# Altium PCB PCB2.PcbDoc
Units mm, origin at the board's own origin, x right, y up, seen from the top; angles counter-clockwise.
Board outline 44.32 x 52.83 mm, 4 copper layers (Top Layer, Int1 (GND), Int2 (PWR), Bottom Layer), stack 1.369 mm thick; 16 components, 14 nets, 84 pads, 10 vias.
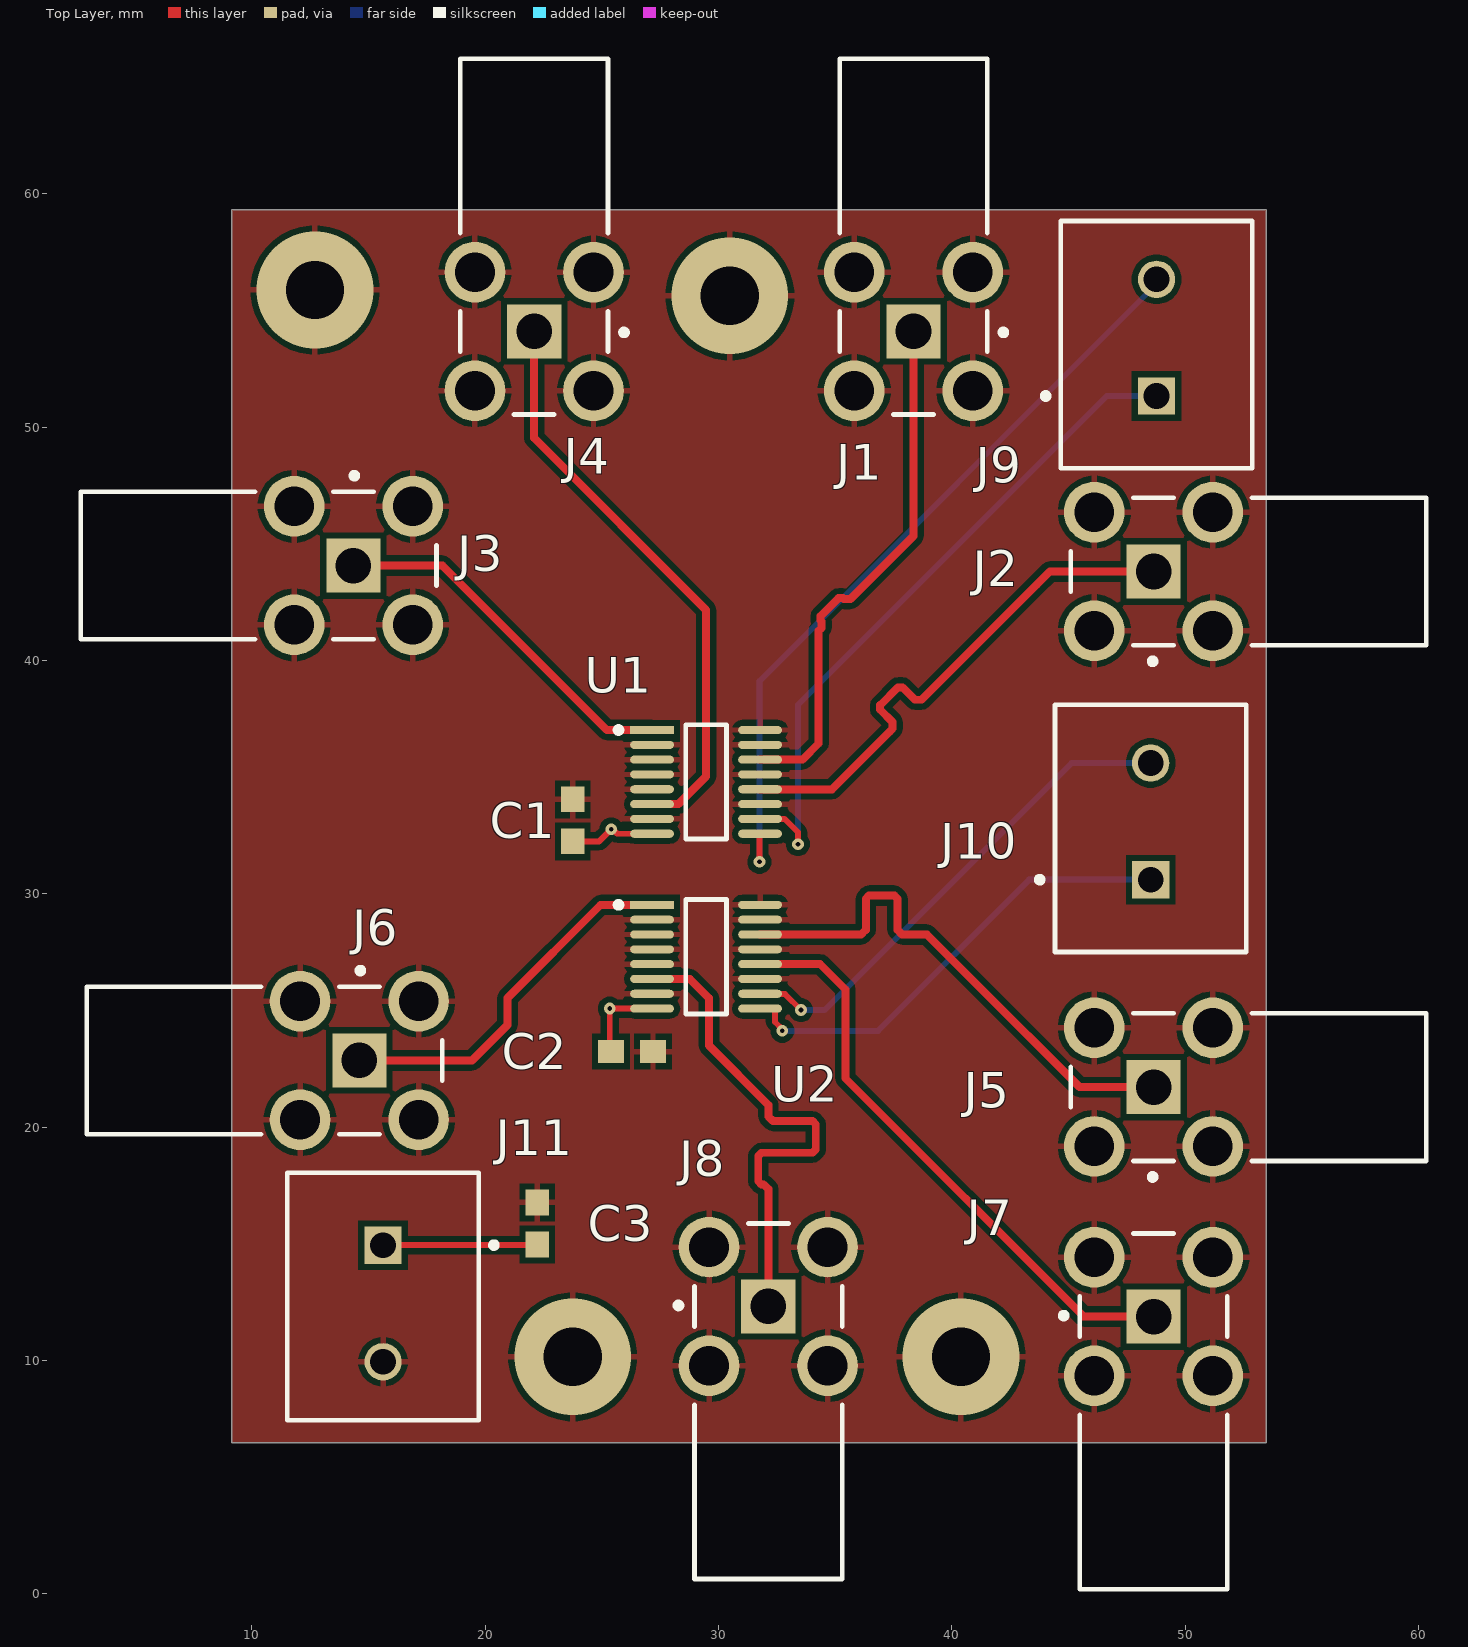
[diagram p0: Top Layer view]
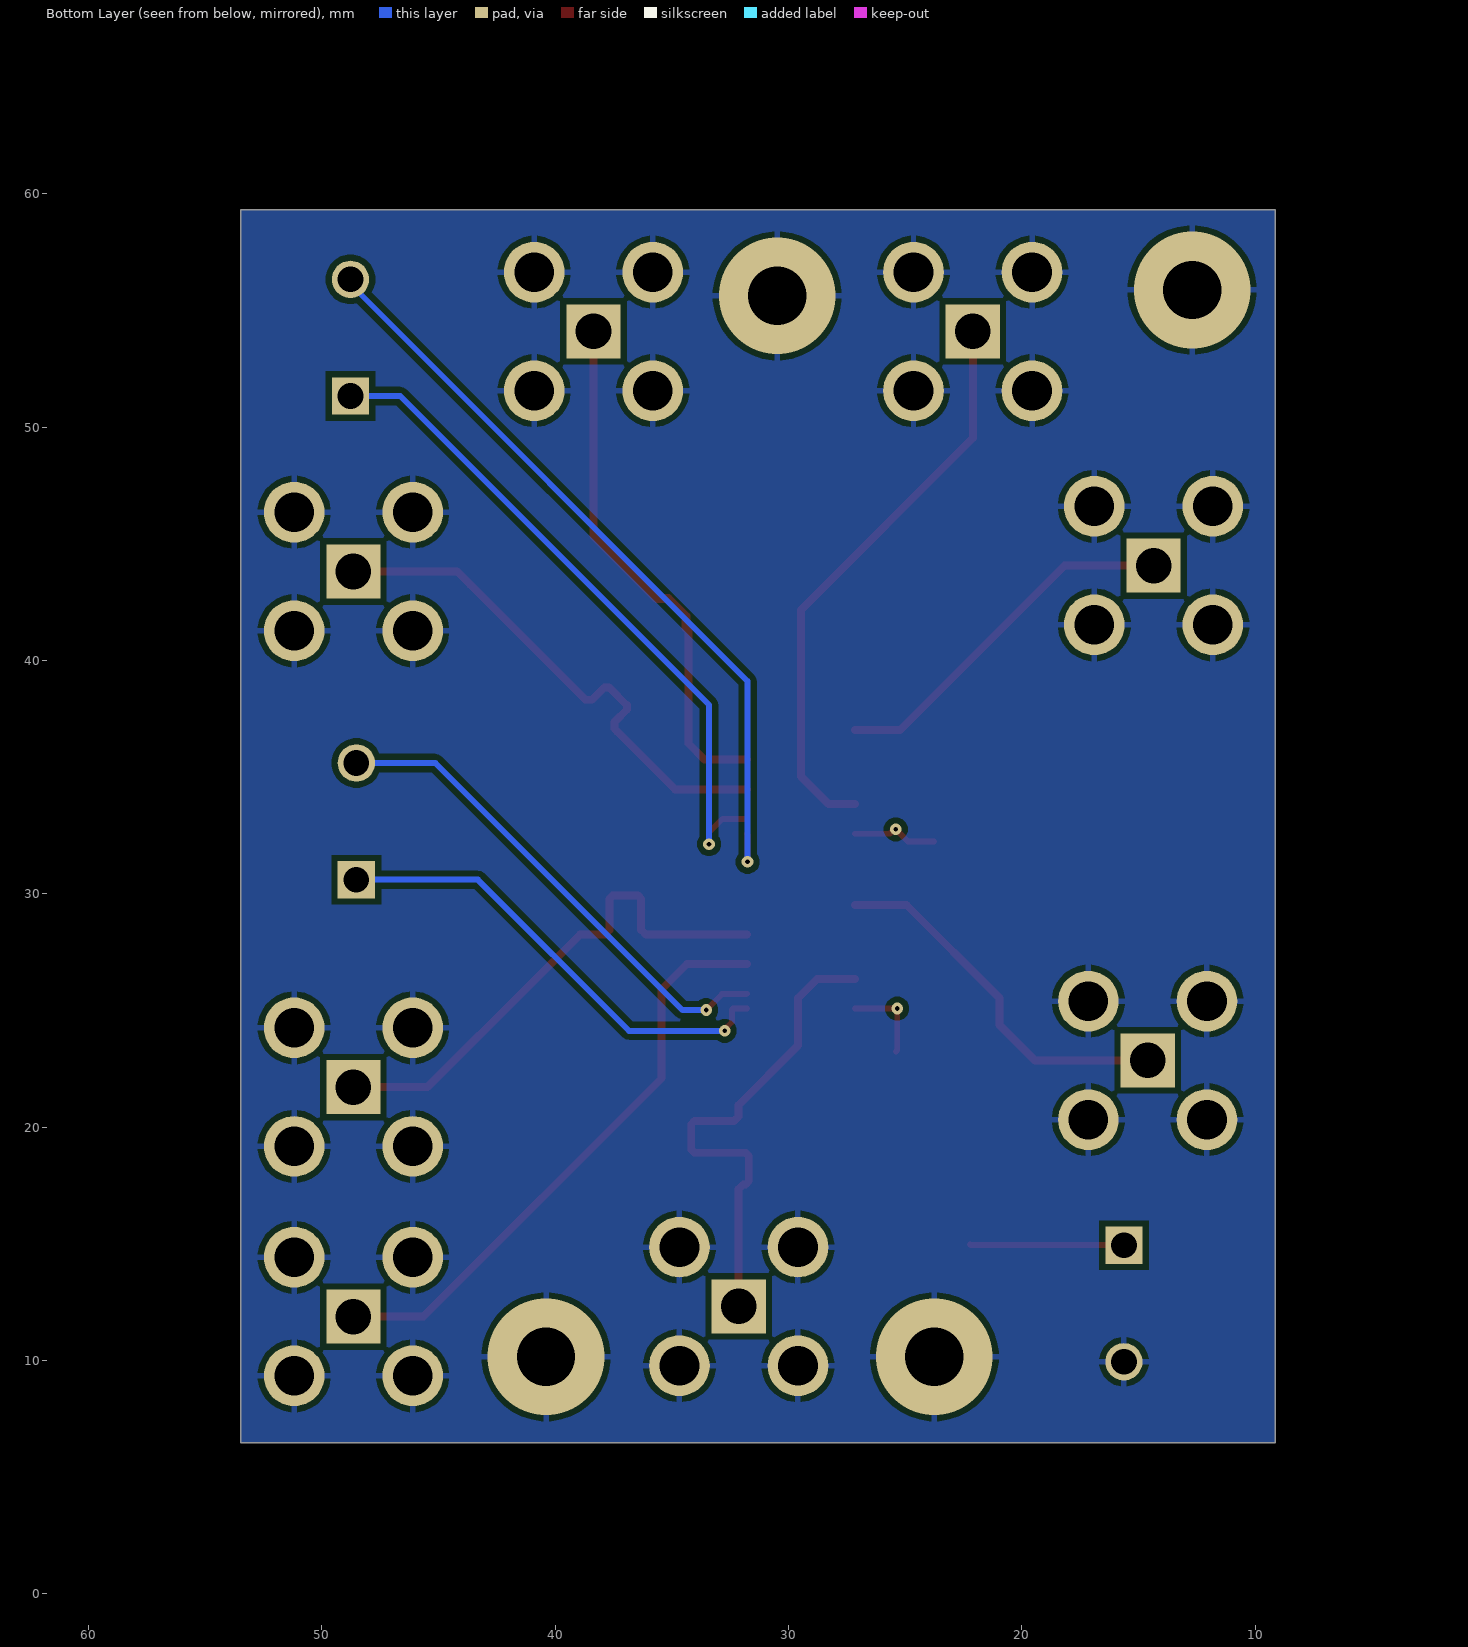
[diagram p1: Bottom Layer view, seen from below]
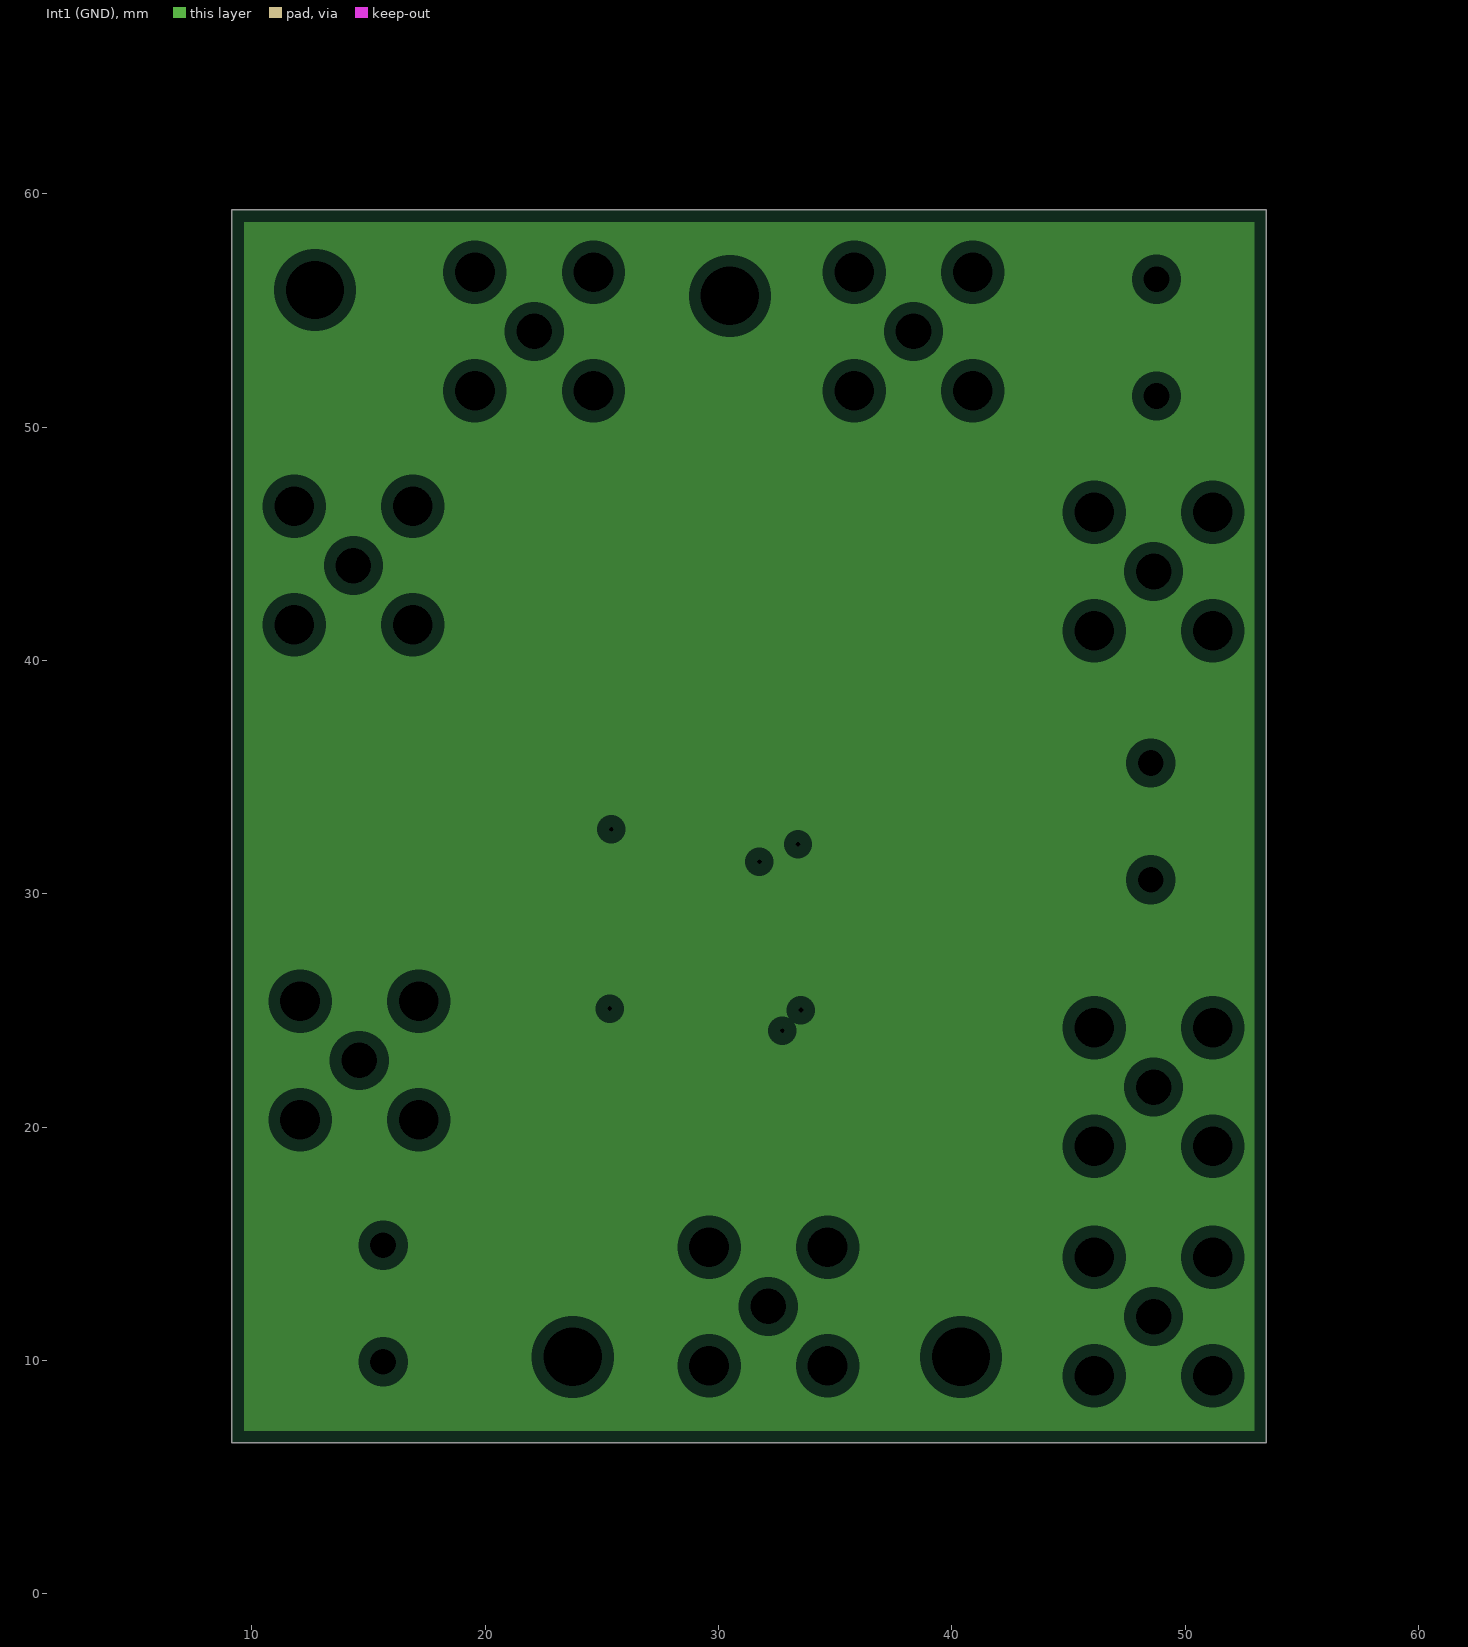
[diagram p2: Int1 (GND), clearances drawn from the general rule]
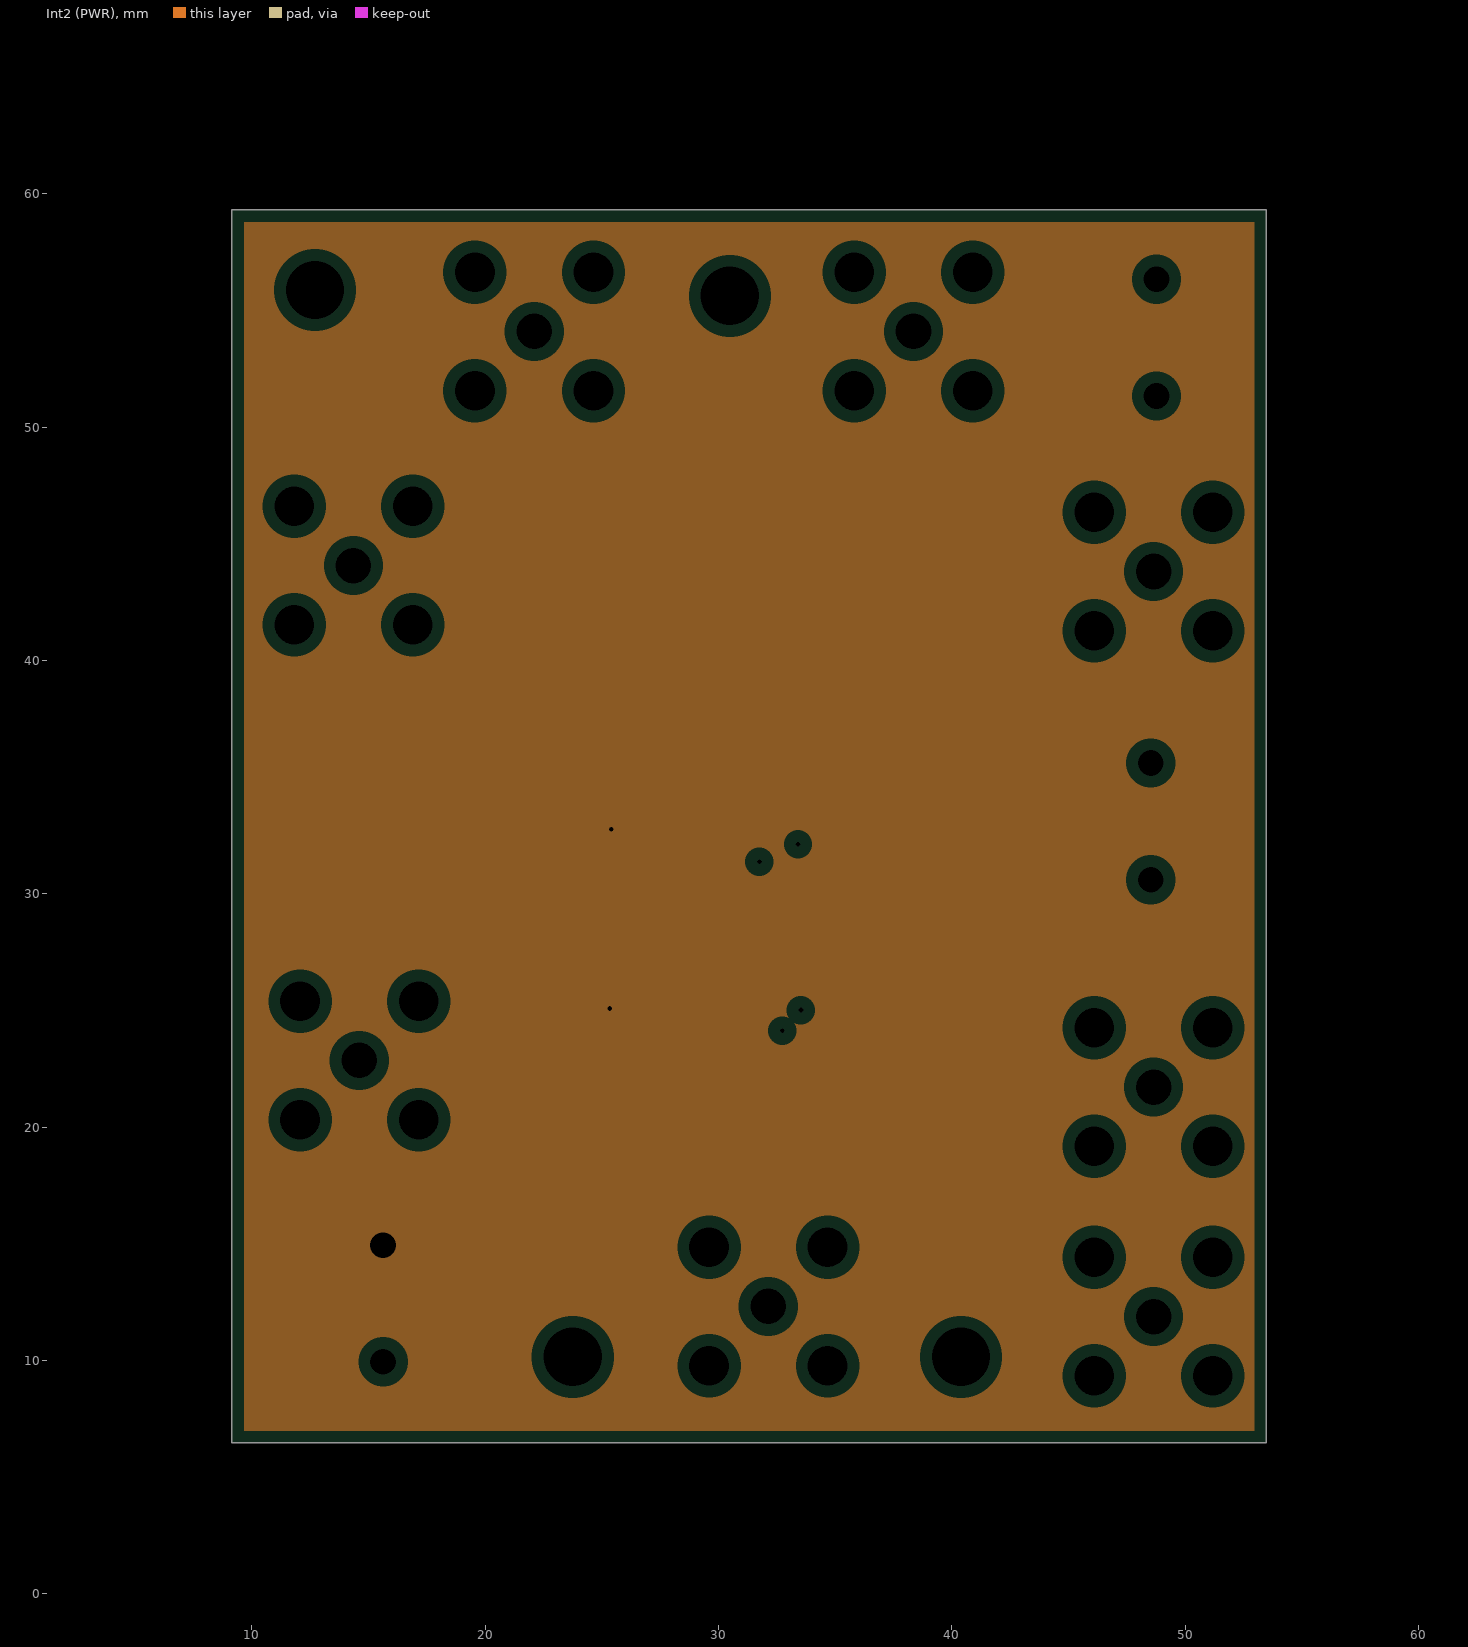
[diagram p3: Int2 (PWR), clearances drawn from the general rule]
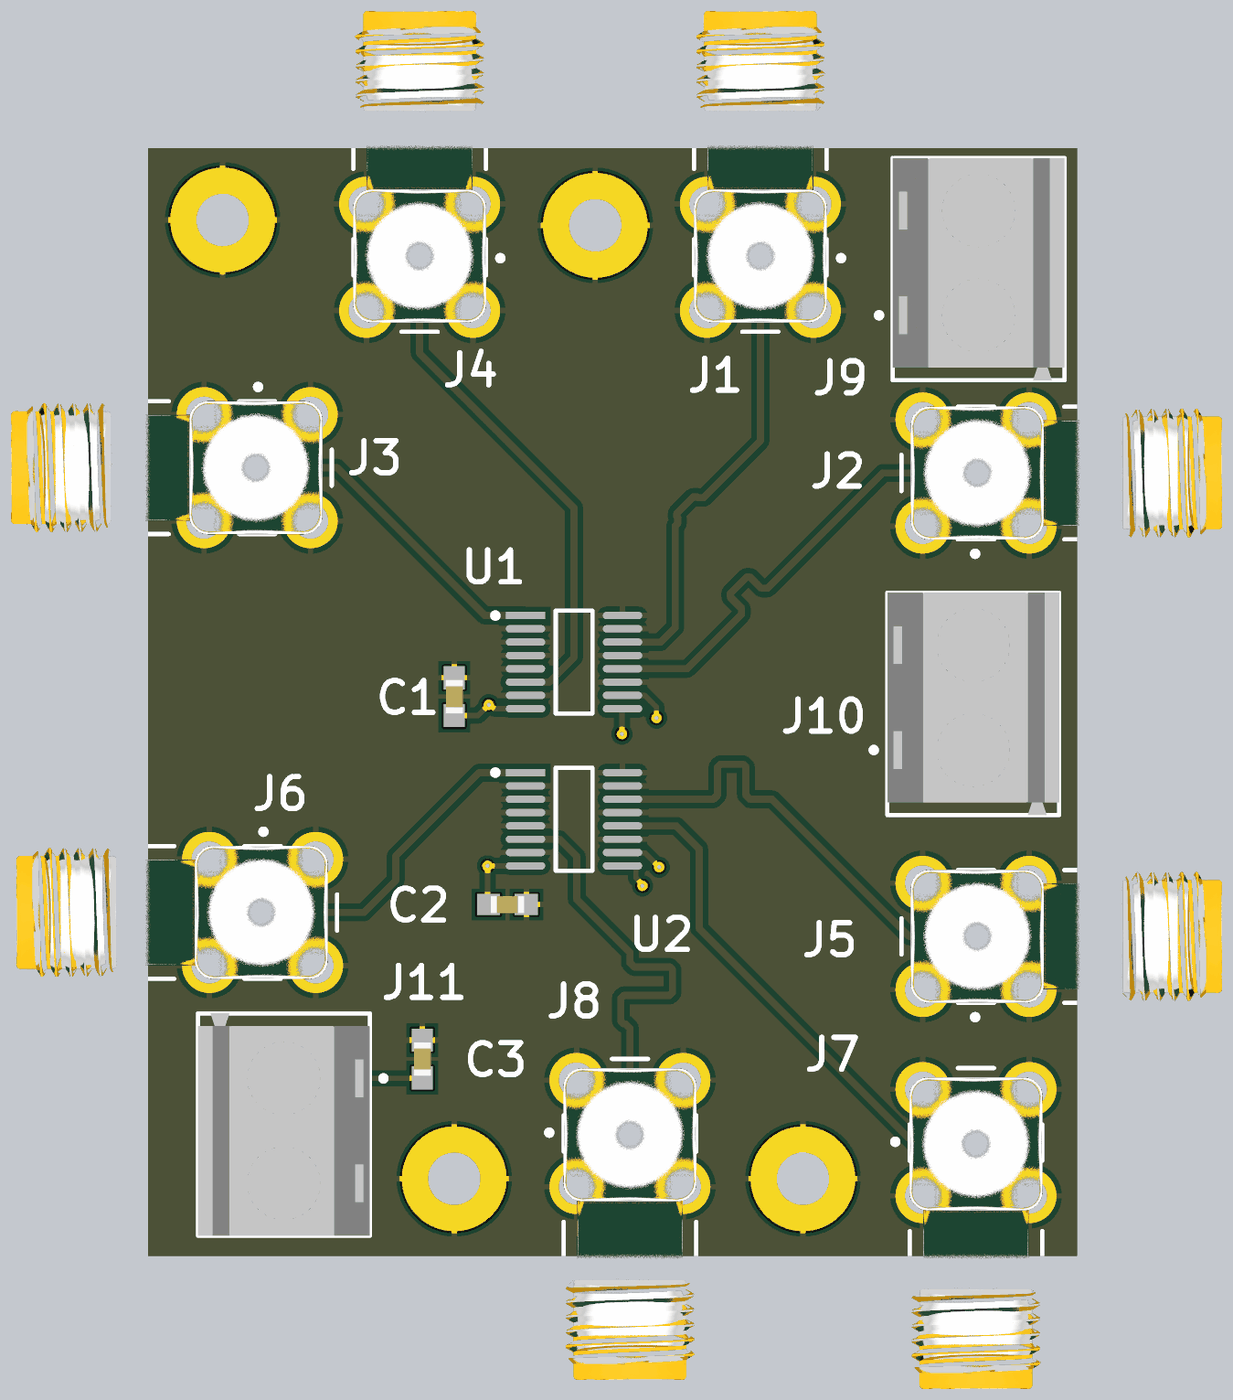
[diagram p4: 3D render of the assembled board from above, using the file's embedded part models]

## Layer stack, top to bottom
Top Solder: solder mask 0.0254, SM-001, Dk 4
Top Layer: signal copper 0.035
Dielectric 1: prepreg 0.1295, PP-017, Dk 4.3
Dielectric 2: prepreg 0.1295, PP-017, Dk 4.3
Int1 (GND): plane copper 0.035
Dielectric 3: core 0.7112, Core-039, Dk 4.8
Int2 (PWR): plane copper 0.035, net +5
Dielectric 4: prepreg 0.1295, PP-017, Dk 4.3
Dielectric 5: prepreg 0.1295, PP-017, Dk 4.3
Bottom Layer: signal copper 0.035
Bottom Solder: solder mask 0.0254, SM-001, Dk 4

## Board outline
9.144,6.477 53.467,6.477 53.467,59.309 9.144,59.309

## Design rules (kind name [scope] priority, off if disabled: settings)
Clearance [All] p1: gap=0.254 ignorepadtopadclearanceinfootprint=FALSE except(0: Arc-Hole Track-Hole SMDPad-Hole THPad-Hole Via-Hole Fill-Hole Poly-Hole Region-Hole Text-Hole)
MatchedLengths MatchedLengths_1 [InNetClass('OUT')] p1: tolerance=25.4 checknetsindiffpair=FALSE checkdiffpairvsdiffpair=TRUE checkxsignals=TRUE checkothers=TRUE
MatchedLengths [InNetClass('IN')] p2: tolerance=10 checknetsindiffpair=FALSE checkdiffpairvsdiffpair=TRUE checkxsignals=TRUE checkothers=TRUE
MaxMinImpedance [InNetClass('RF')] p1: minimum=1,000 maximum=10,00
PlaneClearance [All] p1: clearance=0.508
PlaneConnect [All] p1: planeconnectstyle=Relief reliefexpansion=0.508 reliefentries=4 reliefconductorwidth=0.254 reliefairgap=0.254
PolygonConnect [All] p1: connectstyle=Relief reliefconductorwidth=0.254 reliefentries=4 polygonreliefangle="90 Angle" airgapwidth=0.254
RoutingVias [All] p1: holewidth=0.2 width=0.5 viastyle="Through Hole" minholewidth=0.2 minwidth=0.5 maxholewidth=0.711 maxwidth=1.27
SolderMaskExpansion [All] p1: expansion=0.102 istentingtop=FALSE
Width Width_1 [InNetClass('RF')] p1: maxlimit=0.5 minlimit=0.34 preferedwidth=0.4 minimp=50.000000 maximp=50.000000 favimp=50.000000
Width [All] p2: maxlimit=0.254 minlimit=0.254 preferedwidth=0.254
28 further rules are at their usual default settings.

## Classes and differential pairs
net class RF: ANT1 ANT2 ANT3 ANT4 ANT5 ANT6 NetJ3_1 NetJ6_1
net class IN: NetJ3_1 NetJ6_1
net class OUT: ANT1 ANT2 ANT3 ANT4 ANT5 ANT6

## Components (designator, comment, footprint, x,y, rotation, side; value= is the part's Value field where it differs from the comment)
C1 "Cap SMD" "C0603 (1608)" 23.749,33.147 r270 top value=10nF
C2 "Cap SMD" "C0603 (1608)" 26.289,23.241 r180 top value=10nF
C3 "Cap SMD" "C0603 (1608)" 22.225,15.875 r270 top value=100nF
J1 "221790-1" FP-221790-1-MFG 38.354,58.166 r270 top
J2 "221790-1" FP-221790-1-MFG 52.705,43.815 r180 top
J3 "221790-1" FP-221790-1-MFG 10.287,44.069 r0 top
J4 "221790-1" FP-221790-1-MFG 22.098,58.166 r270 top
J5 "221790-1" FP-221790-1-MFG 52.705,21.717 r180 top
J6 "221790-1" FP-221790-1-MFG 10.541,22.86 r0 top
J7 "221790-1" FP-221790-1-MFG 48.641,7.82 r90 top
J8 "221790-1" FP-221790-1-MFG 32.131,8.255 r90 top
J9 "282836-2" TECO-282836-2_V 48.768,53.835 r90 top
J10 "282836-2" TECO-282836-2_V 48.514,33.107 r90 top
J11 "282836-2" TECO-282836-2_V 15.621,12.446 r270 top
U1 "HMC245AQS16ETR" FP-RQ-16-IPC_C 29.464,34.798 r0 top
U2 "HMC245AQS16ETR" FP-RQ-16-IPC_C 29.464,27.305 r0 top

## Footprints (in the part's own frame and the unit in brackets; to place one, negate y for a bottom-side part, rotate by r counter-clockwise, add the part's x,y. Pads: shape width x height; smd on the part's side, far side on the other; paste and mask are expansions set on the pad)
"C0603 (1608)" [mm]
  rect 1.1x1 smd: 1(-0.9,0) 2(0.9,0)
  body extent -0.8,-0.41 0.8,0.42, height 0.79
FP-221790-1-MFG [mil]
  rect 91.5x91.5 hole 60 paste-39370.1 mask+0: 1(160,0)
  round 102.43 hole 67 paste-39370.1 mask+0: 2(60,100) 3(260,100) 4(60,-100) 5(260,-100)
  silkscreen extent -300,-125 300,156, body extent -304,-155 315,155, height 10
FP-RQ-16-IPC_C [mil]
  rect 73.91x13.66 smd paste+0 mask+0: 1(-91.07,87.5)
  rrect100% 73.91x13.66 smd paste+0 mask+0: 2(-91.07,62.5) 3(-91.07,37.5) 4(-91.07,12.5) 5(-91.07,-12.5) 6(-91.07,-37.5) 7(-91.07,-62.5) 8(-91.07,-87.5) 9(91.07,-87.5) 10(91.07,-62.5) 11(91.07,-37.5) 12(91.07,-12.5) 13(91.07,12.5) 14(91.07,37.5) 15(91.07,62.5) 16(91.07,87.5)
  silkscreen extent -153,-96 34,96
TECO-282836-2_V [mm] "Female Header, Pitch 5mm, 1 x 2 Position, Height 10mm"
  rect 1.6x1.6 hole 1.1: 1(-2.5,0)
  round 1.6 hole 1.1: 2(2.5,0)
  silkscreen extent -5.6,-4.1 5,4.87, body extent -5.6,-4.1 5,4.1, height 10

## Part data
J1 J2 J3 J4 J5 J6 J7 J8: library part CMP-05166-000001-1, "CONN SMA JACK R/A 50 OHM PCB", Dielectric Material=Fluoropolymer, Frequency=4GHz, Manufacturer="TE Connectivity / AMP", Package=0, Temperature="-65°C to +165°C", Temperature Range High=+165°C, Temperature Range Low=-65°C, Voltage Rating=335V, Automotive=No, Category=Conn, ComponentLink2Description=Datasheet, ComponentLink2URL=https://www.te.com/commerce/DocumentDelivery/DDEController?Action=showdoc&DocId=Customer+Drawing%7F221790%7FB1%7Fpdf%7FEnglish%7FENG_CD_221790_B1.pdf%7F221790-1, Conn Orientation="Right Angle", Contact Material=Gold, Device Class L1=Connectors, Device Class L2="RF / Coaxial Connectors", Device Class L3=unset, Digikey Description="CONN SMA JACK R/A 50 OHM PCB", Height=0.38inch, Impedance=50Ω, Is Female=yes, Lead Free=Yes, Manufacturer Part Number=221790-1, Mouser Description="RF Connectors / Coaxial Connectors PCB RIGHT ANGLE JACK", Number of contacts=1, Octopart=https://octopart.com/2217901-te+connectivity+%2F+amp-3339836, RoHS=TRUE, Shielding=true
J9 J10 J11: library part CMP-1684-00017-1, "Female Header, Pitch 5 mm, 1 x 2 Position, Height 10 mm, Tail Length 3.5 mm, Rohs, Bulk", Color=Green, Current=13.5A, Manufacturer="TE Connectivity", Package Description="Female Header, Pitch 5 mm, 1 x 2 Position, Height 10 mm, Tail Length 3.5 mm", Package Reference=THD, Standard Package=300, Voltage=300V, 3D Model=282836-2.pdf, Category=Connectors,Interconnects, Clamp Material - Plating=Brass-NickelPlated, Contact Material - Plating=Brass-TinPlated, Datasheet URL=http://www.te.com.cn/commerce/DocumentDelivery/DDEController?Action=showdoc&DocId=Catalog+Section%7F1308389_EUROSTYLE_TERMINAL_BLOCKS%7F0607%7Fpdf%7FEnglish%7FENG_CS_1308389_EUROSTYLE_TERMINAL_BLOCKS_0607.pdf%7F282836-2, Dynamic Catalog=BuchananSeries, Family=TerminalBlocks-WiretoBoard, Featured Product=EurostyleTerminalBlockConnectors, Features=Interlocking(Side), Housing Material=Polyamide(PA66),Nylon6/6, Manufacturer URL=http://www.te.com, Mating Orientation=HorizontalwithBoard, Mounting Type=ThroughHole, Number of Levels=1, Other Names="5ULV-02B / A98076", Packaging=Bulk, Pitch="0.197\"(5.00mm)", Positions Per Level=2, Product Training Modules=Wire-to-BoardEurostyleTerminalBlocks, RoHS Information=282836-2StatementofCompliance, Screw Material - Plating=Brass-NickelPlated, Screw Thread=M3, Series=Buchanan, Torque - Screw=0.68Nm(6Lb-In), Wire Gauge=16-30AWG, Wire Termination=Screw-RisingCageClamp
U1 U2: library part CMP-09141-000176-1, "IC RF SWITCH SP3T 3.5GHZ 16QSOP", Case/Package=QSOP, Max Frequency=3.5GHz, Max Operating Temperature=85°C, Max Supply Voltage=5.5V, Min Operating Temperature=-40°C, Min Supply Voltage=4.5V, IIP3=48dBm, Impedance=50R, Lead Free="Contains Lead", Number of Pins=16, P1dB=29dBm, Packaging="Cut Tape", REACH SVHC="No SVHC", Throw Configuration=SP4T

## Via types
v1: diameter 0.5, hole 0.2, Top Layer to Bottom Layer, 6 vias
v2: diameter 5, hole 2.5, Top Layer to Bottom Layer, 4 vias

## Nets (pads, with @x,y where several pads share a name; then routed paths per layer and width w, separated by ;. In a path a pad name is that pad's centre, name@x,y a point inside that pad or via, vN(x,y) a via of type N, cw(c..) or ccw(c..) an arc to the next point about the centre after c; other vN are vias at no path point)
+5: C1.2 C2.2 C3.2 J11.1 U1.8 U2.8 | length 14
  Top Layer w0.254: J11.1 22.196,14.946 C3.2 ; C1.2 24.881,32.247 v1(25.4,32.766) 25.467,32.766 25.657,32.575 U1.8 ; C2.2 25.336,23.294 v1(25.336,25.082) U2.8
A1: J9.1 U1.10 | length 29.2
  Top Layer w0.254: U1.10 32.83,33.21 33.401,32.639 v1(33.401,32.131)
  Bottom Layer w0.254: v1(33.401,32.131) 33.401,38.1 46.636,51.335 J9.1
A2: J10.2 U2.10 | length 21.4
  Top Layer w0.254: U2.10 31.795,25.7 32.847,25.7 v1(33.528,25.019)
  Bottom Layer w0.254: v1(33.528,25.019) 34.544,25.019 45.132,35.607 J10.2
ANT1: J1.1 U1.14 | length 22.5
  Top Layer w0.34: U1.14 33.591,35.75 34.29,36.449 34.29,41.275 34.41,41.395 34.41,41.677 34.374,41.713 34.374,41.905 35.141,42.672 35.333,42.672 35.369,42.636 35.651,42.636 38.354,45.339 38.354,48.26 J1.1
ANT2: J2.1 U1.12 | length 22.5
  Top Layer w0.34: U1.12 34.861,34.48 37.338,36.957 37.458,37.077 37.458,37.359 36.924,37.893 36.924,38.084 37.692,38.851 37.883,38.851 38.417,38.318 38.699,38.318 43.624,43.243 44.196,43.815 J2.1
ANT3: J4.1 U1.6 | length 24.9
  Top Layer w0.34: J4.1 22.098,49.53 29.464,42.164 29.464,35.027 28.283,33.847 27.152,33.847 U1.6
ANT4: J5.1 U2.14 | length 22.5
  Top Layer w0.34: U2.14 35.941,28.258 36.111,28.258 36.31,28.457 36.31,29.79 36.446,29.926 37.531,29.926 37.666,29.79 37.666,28.457 37.865,28.258 38.925,28.258 41.021,26.162 45.466,21.717 J5.1
ANT5: J7.1 U2.12 | length 25.4
  Top Layer w0.34: U2.12 34.353,26.987 35.433,25.908 35.433,22.098 45.647,11.884 J7.1
ANT6: J8.1 U2.6 | length 21.4
  Top Layer w0.34: U2.6 28.766,26.352 29.591,25.527 29.591,23.495 32.131,20.955 32.131,20.629 32.131,20.459 32.33,20.26 34.027,20.26 34.163,20.124 34.163,19.039 34.027,18.904 31.836,18.904 31.701,18.768 31.701,17.683 31.836,17.548 31.932,17.548 32.131,17.349 32.131,16.637 J8.1
B1: J9.2 U1.9 | length 33.2
  Top Layer w0.254: v1(31.75,31.369) 31.75,32.548 U1.9
  Bottom Layer w0.254: v1(31.75,31.369) 31.75,39.116 48.768,56.134 J9.2
B2: J10.1 U2.9 | length 20.2
  Top Layer w0.254: U2.9 32.372,25.082 32.415,25.04 32.415,24.511 32.73,24.197 v1(32.73,24.13)
  Bottom Layer w0.254: v1(32.73,24.13) 36.83,24.13 43.307,30.607 J10.1
GND: C1.1 C2.1 C3.1 J1.2 J1.3 J1.4 J1.5 J2.2 J2.3 J2.4 J2.5 J3.2 J3.3 J3.4 J3.5 J4.2 J4.3 J4.4 J4.5 J5.2 J5.3 J5.4 J5.5 J6.2 J6.3 J6.4 J6.5 J7.2 J7.3 J7.4 J7.5 J8.2 J8.3 J8.4 J8.5 J11.2 U1.2 U1.3 U1.4 U1.5 U1.7 U1.11 U1.13 U1.15 U1.16 U2.2 U2.3 U2.4 U2.5 U2.7 U2.11 U2.13 U2.15 U2.16
  other v2: 23.749,10.16 40.386,10.16 30.48,55.626 12.7,55.88
NetJ3_1: J3.1 U1.1 | length 15.7
  Top Layer w0.34: J3.1 18.161,44.069 25.209,37.02 U1.1
NetJ6_1: J6.1 U2.1 | length 16
  Top Layer w0.34: J6.1 19.431,22.86 20.955,24.384 20.955,25.537 24.946,29.527 U2.1

## Polygon pours and split planes (outlines as drawn)
GND on Bottom Layer "GND_L04_P001" (solid, pour order 1): 9.144,59.309 53.467,59.309 53.467,6.477 9.144,6.477
GND on Top Layer "GND_L01_P000" (solid, pour order 0): 9.144,59.309 53.467,59.309 53.467,6.477 9.144,6.477
+5 on Int2 (PWR) (split plane): 52.957,6.987 9.654,6.987 9.654,58.799 52.957,58.799
no net on Int1 (GND) (split plane): 52.957,6.987 9.654,6.987 9.654,58.799 52.957,58.799